# Altium PCB Power.PcbDoc
Units mm, origin at the board's own origin, x right, y up, seen from the top; angles counter-clockwise.
Board outline 109 x 111 mm, 2 copper layers (Top Layer, Bottom Layer); 18 components, 10 nets, 53 pads, 0 vias.
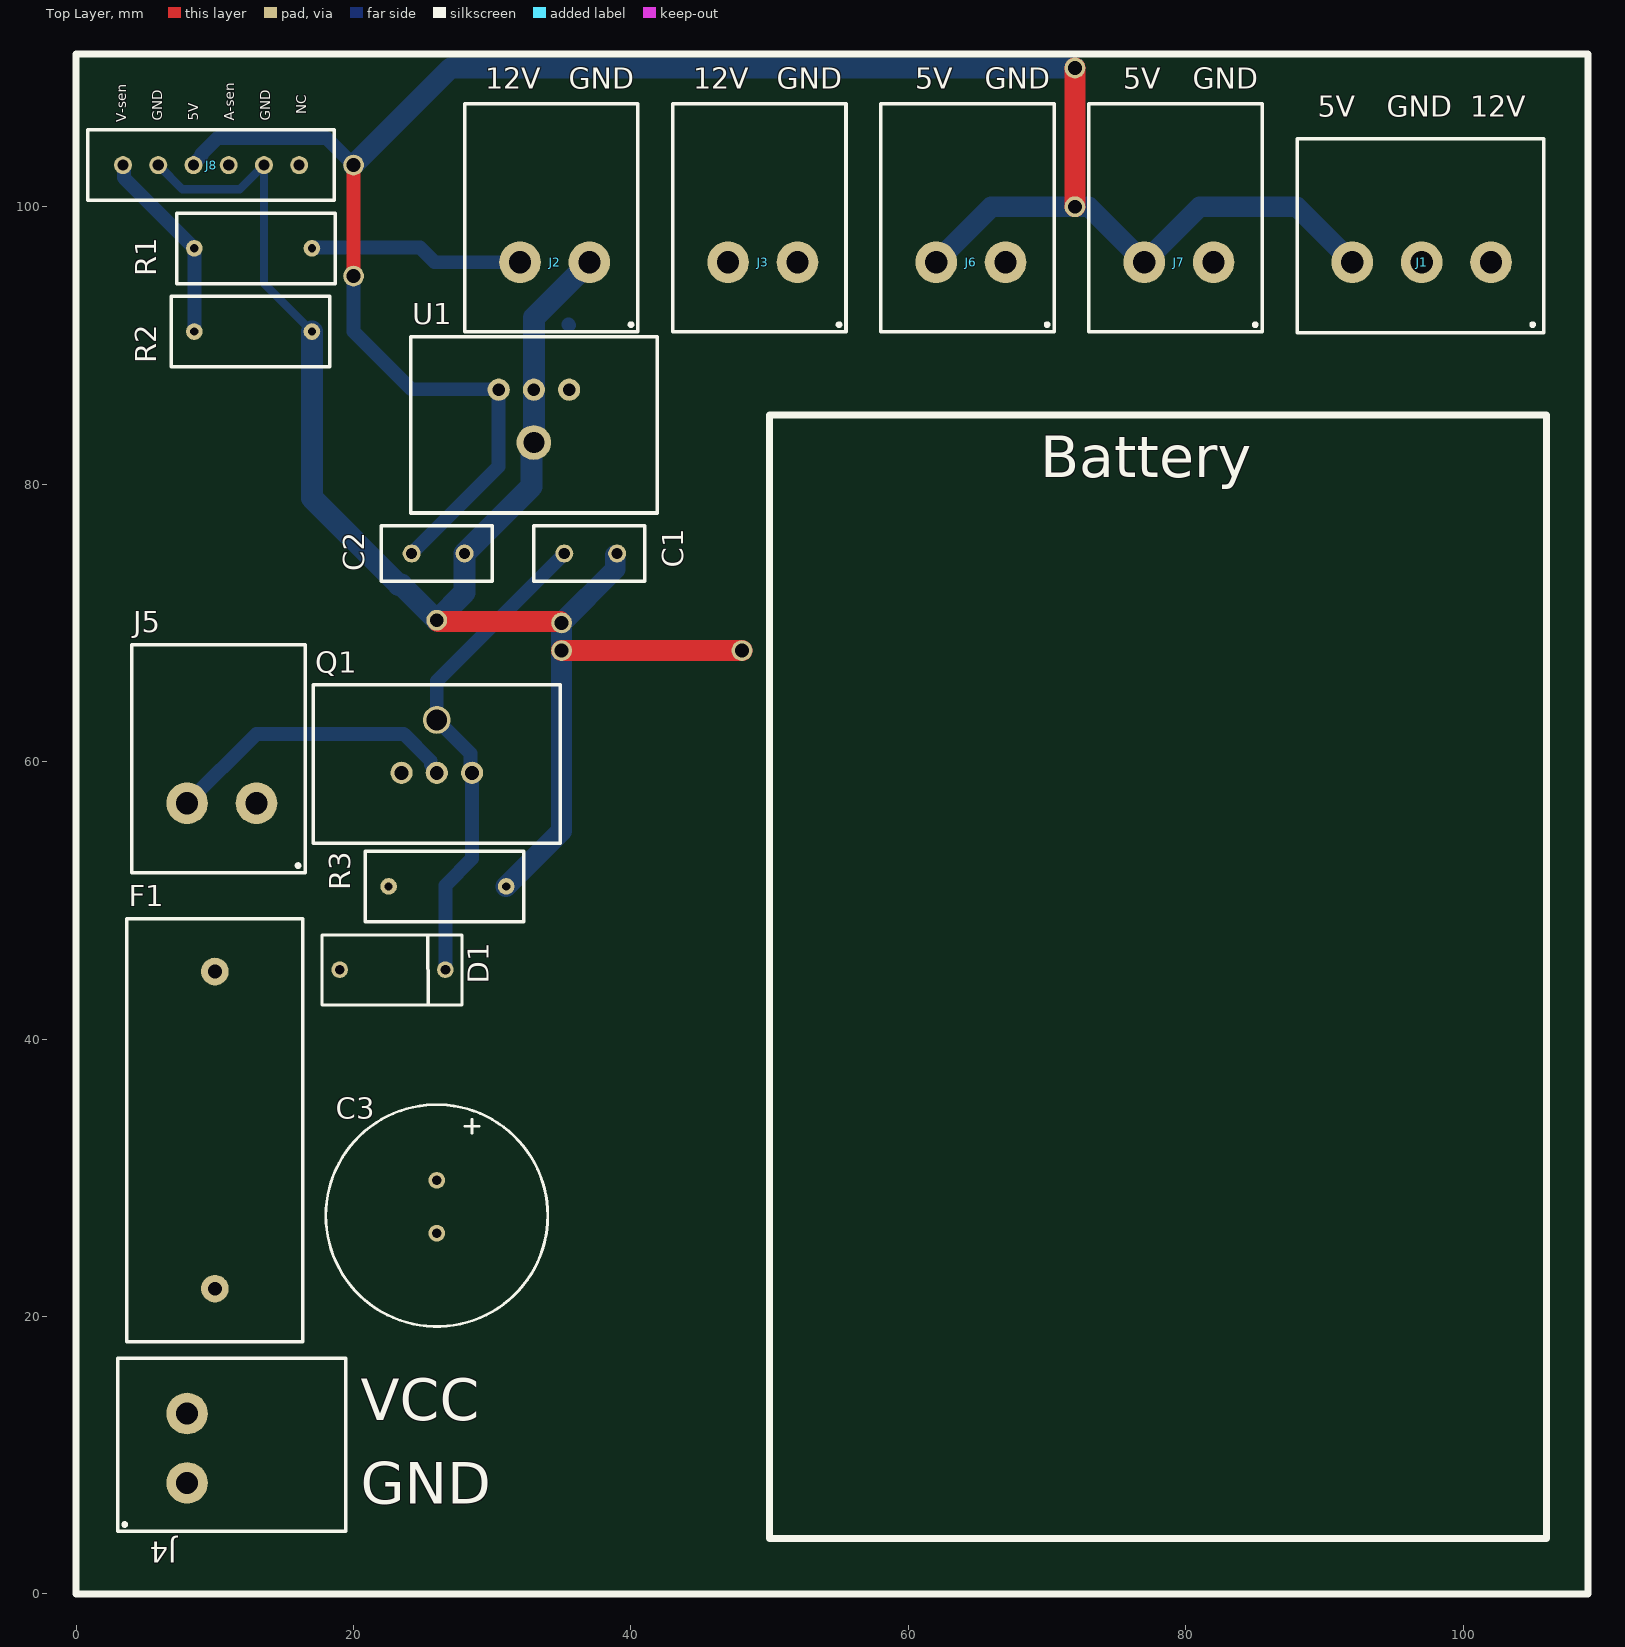
[diagram p0: Top Layer view]
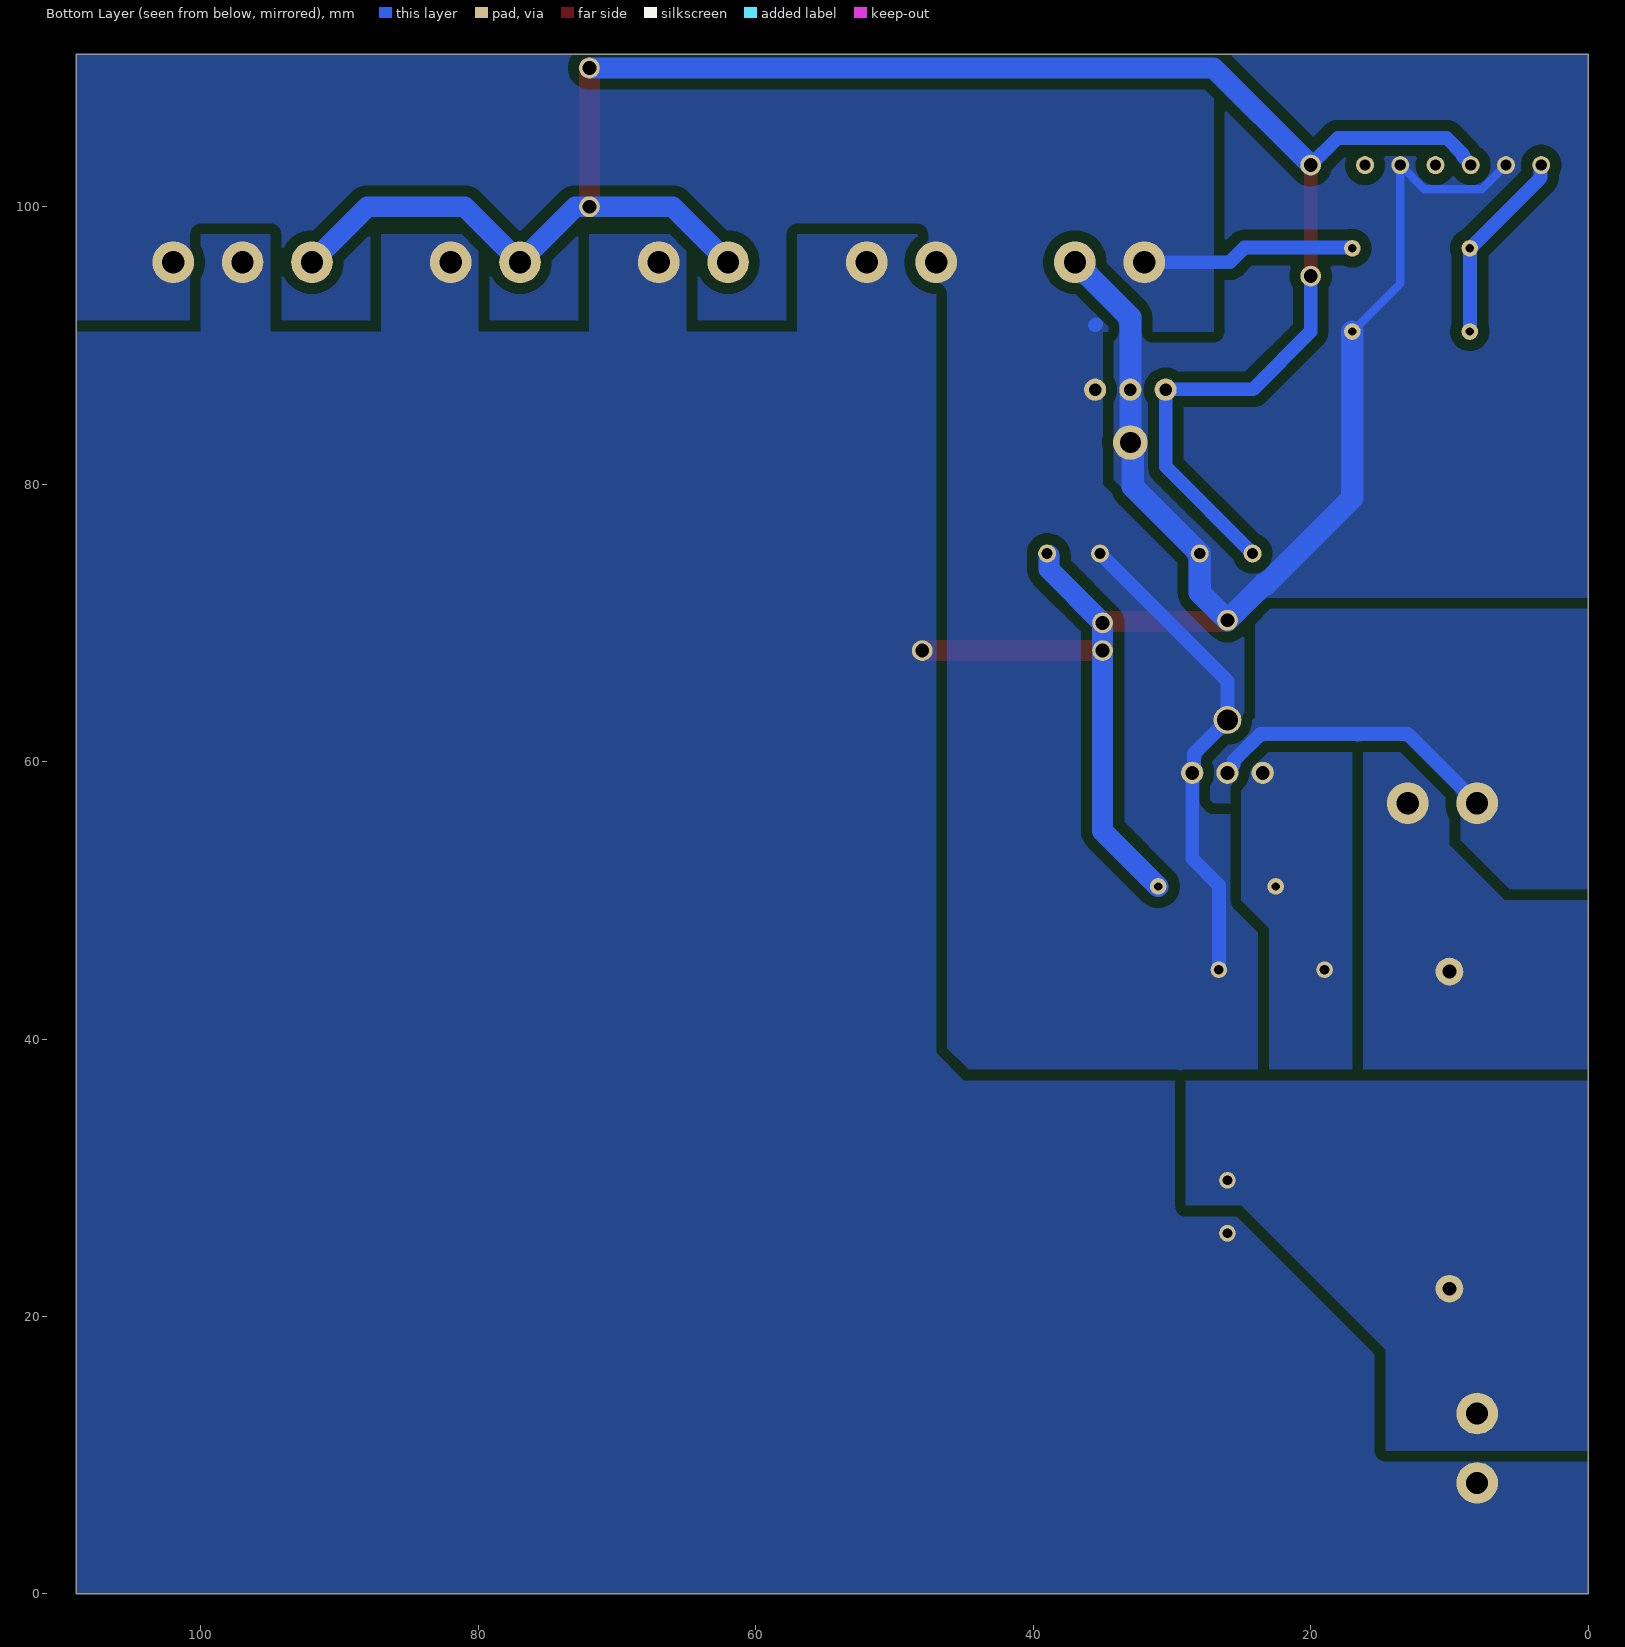
[diagram p1: Bottom Layer view, seen from below]

## Layer stack, top to bottom
Top Solder: solder mask 0.0102, Solder Resist, Dk 3.5
Top Layer: signal copper 0.0356
Dielectric 1: dielectric 0.32, FR-4, Dk 4.8
Bottom Layer: signal copper 0.0356
Bottom Solder: solder mask 0.0102, Solder Resist, Dk 3.5

## Board outline
109,111 0,111 0,0 109,0

## Design rules (kind name [scope] priority, off if disabled: settings)
Clearance [All] p1: gap=0.8 ignorepadtopadclearanceinfootprint=FALSE
PlaneClearance [All] p1: clearance=0.8
PlaneConnect [All] p1: planeconnectstyle=Relief reliefexpansion=0.8 reliefentries=4 reliefconductorwidth=0.8 reliefairgap=0.8
PolygonConnect [All] p1: connectstyle=Direct reliefconductorwidth=0.6 reliefentries=4 polygonreliefangle="90 Angle" airgapwidth=0.6
RoutingVias [All] p1: holewidth=0.711 width=1.27 viastyle="Through Hole" minholewidth=0.711 minwidth=1.27 maxholewidth=0.711 maxwidth=1.27
SolderMaskExpansion [All] p1: expansion=0.102 istentingtop=FALSE
Width [All] p1: maxlimit=2 minlimit=0.6 preferedwidth=0.8 minimp=50.000000 maximp=50.000000 favimp=50.000000
28 further rules are at their usual default settings.

## Classes and differential pairs
component class Power: C1 C2 C3 D1 F1 J2 J3 J4 J5 J6 J7 J8 Q1 R1 R2 R3 U1

## Components (designator, comment, footprint, x,y, rotation, side; value= is the part's Value field where it differs from the comment)
C1 "Ceramic Capacitor" "Ceramic Cap" 39,75 r180 top value=0.33uF
C2 "Ceramic Capacitor" "Ceramic Cap" 28,75 r180 top value=0.01uF
C3 "ALCapacitor" ALCap. 26,29.81 r270 top value=47uF
D1 "Zener" Zener10 19,45 r0 top
F1 "Fuse" "Fuse Base" 10,22 r90 top value=6A
J1 "Terminal Block 3" "Terminal Block 3" 102,96 r180 top
J2 "Terminal Block 2-pins" "Terminal Block 2 Plugable" 37,96 r180 top
J3 "Terminal Block 2-pins" "Terminal Block 2 Plugable" 52,96 r180 top
J4 "Terminal Block 2-pins" "Terminal Block 2 Plugable" 8,8 r90 top
J5 "Current Sensor" "Terminal Block 2 Plugable" 13,57 r180 top
J6 "Terminal Block 2-pins" "Terminal Block 2 Plugable" 67,96 r180 top
J7 "Terminal Block 2-pins" "Terminal Block 2 Plugable" 82,96 r180 top
J8 "Headers-6" "Headers 6-pins" 16.08,103 r180 top
Q1 "MOSFET" IRF9540 23.46,59.19 r0 top
R1 "Resistor" resistor 8.524,97 r0 top value=30K
R2 "Resistor" resistor 17,91 r180 top value=7.5K
R3 "Resistor" resistor 31,51 r180 top value=100K
U1 "LM7805" LM7805 35.54,86.81 r180 top

## Footprints (in the part's own frame and the unit in brackets; to place one, negate y for a bottom-side part, rotate by r counter-clockwise, add the part's x,y. Pads: shape width x height; smd on the part's side, far side on the other; paste and mask are expansions set on the pad)
ALCap. [mm]
  round 1.2 hole 0.7: 1(0,0) 2(3.81,0)
  silkscreen extent -5.46,-8 10.54,8, body extent -3.02,-5.05 6.98,4.95, height 20
"Ceramic Cap" [mm]
  round 1.3 hole 0.8: 1(0,0) 2(3.81,0)
  silkscreen extent -2,-2 6,2, body extent -0.83,-1.21 4.83,1.25, height 4
"Fuse Base" [mm]
  round 2 hole 1: 1(0,0) 2(22.86,0)
  silkscreen extent -3.81,-6.35 26.67,6.35, body extent -1.95,-4.8 25.23,4.8, height 13.07
"Headers 6-pins" [mm]
  round 1.3 hole 0.8: 1(0,0) 2(2.54,0) 3(5.08,0) 4(7.62,0) 5(10.16,0) 6(12.7,0)
  silkscreen extent -2.54,-2.54 15.24,2.54, body extent -1.27,-1.27 13.97,1.27, height 8.47
IRF9540 [mm]
  round 1.6 hole 1: D(2.54,0) G(0,0) S(5.08,0)
  round 2 hole 1.5: S(2.54,3.81)
  silkscreen extent -6.35,-5.08 11.43,6.35, body extent -4.96,-4.47 10.04,5.08, height 20.8
LM7805 [mm]
  round 1.6 hole 0.9: 1(0,0) 2(2.54,0) 3(5.08,0)
  round 2.5 hole 1.5: S(2.54,3.81)
  silkscreen extent -6.35,-3.81 11.43,8.89, body extent -4.81,-3.03 9.89,7.47, height 22.95
resistor [mm]
  round 1.2 hole 0.6: 1(0,0) 2(8.476,0)
  silkscreen extent -1.27,-2.54 10.16,2.54, body extent -0.33,-1.25 8.77,1.25, height 3.25
"Terminal Block 2 Plugable" [mm]
  round 3 hole 1.6: 1(0,0) 2(5,0)
  silkscreen extent -3.5,-11.43 9,5, body extent -2.46,-10.16 7.54,1.84, height 9.2
"Terminal Block 3" [mm]
  round 3 hole 1.6: 1(0,0) 2(5,0) 3(10,0)
  silkscreen extent -3.81,-8.89 13.97,5.08, body extent -2.54,-8.29 12.7,3.81, height 8.67
Zener10 [mm]
  round 1.2 hole 0.7: 1(0,0) 2(7.62,0)
  silkscreen extent -1.27,-2.54 8.83,2.5, body extent -0.26,-1 7.86,1, height 2

## Part data
J5: library part "Terminal Block 2-pins", MF="Phoenix Contact", PN=1935161, Supplier=Digikey, Supplier PN=277-1667-ND
Q1: "P-Channel", ComponentLink1Description=link, ComponentLink1URL=https://makerselectronics.com/product/irf9540, PN=IRF9540N, Supplier=Makers, Supplier PN=14721190833f
D1: Vd=10V
J2 J3 J4 J6 J7: MF="Phoenix Contact", PN=1935161, Supplier=Digikey, Supplier PN=277-1667-ND
U1: ComponentLink1Description=link, ComponentLink1URL=https://makerselectronics.com/product/regelator-7805, PN=LM7805, Supplier=Makers

## Free pads (board coordinates)
  round 1.5 hole 1: S3(26,70.19) S4(35,70) S7(20,103) S8(20,95) S11(35,68) S12(48,68) S13(72,100) S14(72,110)

## Nets (pads, with @x,y where several pads share a name; then routed paths per layer and width w, separated by ;. In a path a pad name is that pad's centre, name@x,y a point inside that pad or via, vN(x,y) a via of type N, cw(c..) or ccw(c..) an arc to the next point about the centre after c; other vN are vias at no path point)
+5V0: C2.2 J1.3 J6.2 J7.2 J8.4 pad.S7 pad.S8 pad.S13 pad.S14 U1.3 | length 153.4
  Top Layer w1: pad.S8 pad.S7
  Top Layer w1.5: pad.S13 pad.S14
  Bottom Layer w1: J8.4 8.46,103.081 9.05,103.671 9.05,103.808 10.192,104.95 18.05,104.95 pad.S7 ; pad.S8 20,91 24.16,86.84 30.43,86.84 U1.3 30.45,86.8 30.45,81.26 C2.2
  Bottom Layer w1.5: pad.S7 27,110 pad.S14 ; J6.2 66,100 pad.S13 73,100 J7.2 81,100 88,100 J1.3
+12V0: C1.2 D1.2 J1.1 J2.2 J3.2 Q1.S R1.2 U1.1 | length 51.2
  Bottom Layer w1: R1.2 17.054,97 17.104,97.05 24.78,97.05 25.83,96 J2.2 ; D1.2 26.62,51.081 28.54,53.001 28.54,59.19 28.425,59.305 28.425,60.575 26,63 26,65.81 C1.2 ; 35.485,91.515 35.54,91.46
GND: C1.1 C2.1 C3.2 J1.2 J2.1 J3.1 J4.1 J6.1 J7.1 J8.2 J8.5 pad.S3 pad.S4 pad.S11 pad.S12 R2.1 R3.1 U1.2 U1.S | length 126.8
  Top Layer w0.6: pad.S4@34.905,70.095 pad.S4
  Top Layer w1.5: pad.S3@26.095,70.095 pad.S4@34.905,70.095 ; pad.S11 pad.S12
  Bottom Layer w0.6: J8.5 7.67,101.25 11.79,101.25 J8.2 13.54,94.46 R2.1 ; C1.1@38.866,74.866 C1.1
  Bottom Layer w1.5: R3.1 35,55 pad.S11 pad.S4 38.866,73.866 C1.1@38.866,74.866
  Bottom Layer w1.6: R2.1 17,79.008 23.258,72.75 23.44,72.75 pad.S3 28,72.19 C2.1 32.828,79.828 32.828,82.828 U1.S U1.2 33,92 J2.1
NC: J8.1
NetD1_1: D1.1 Q1.G R3.2
NetF1_2: F1.2 J5.1
NetJ5_2: J5.2 Q1.D | length 21.5
  Bottom Layer w1: J5.2 13,62 23.62,62 25.56,60.06 25.56,59.792 26,59.352 Q1.D
Sensed_A: J8.3
Sensed_V: J8.6 R1.1 R2.2 | length 14.1
  Bottom Layer w1: J8.6 3.437,102.943 3.437,102.087 R1.1 R2.2
VCC: C3.1 F1.1 J4.2

## Polygon pours and split planes (outlines as drawn)
+12V0 on Bottom Layer "NONET_L01_P-001" (solid, pour order 16): 109,111 27,111 27,91 106,91 27,91 109,91
GND on Bottom Layer "NONET_L01_P-001" (solid, pour order 17): 0,111 0,71 0.012,70.988 33.796,70.988 33.796,72.796 41,80 41,111
+12V0 on Bottom Layer "NONET_L01_P-001" (solid, pour order 14): 23,37 23,48 25,50 25,57 27,57 27,60 24,63 24,71 26,71 35,80 35,91 42,91 42,98 47,98 47,39 45,37
NetJ5_2 on Bottom Layer "NONET_L01_P-001" (solid, pour order 8): 0,50 6,50 10.264,54.264 10.264,57.409 10.409,57.409 14,61 14.311,60.689 23.311,60.689 25,59 25,57 27,57 27.347,57.347 27.347,60.9 26.291,60.9 24,63.191 24,71 0,71
GND on Bottom Layer "NONET_L01_P-001" (solid, pour order 12): 0.046,10.327 14.596,10.327 14.596,17.596 25,28 29,28 29,37 45,37 47,39 47,98 57,98 57,91 65,91 65,98 72,98 72,91 80,91 80,98 87,98 87,91 95,91 95,98 100,98 100,91 109,91 109,0 0,0
NetF1_2 on Bottom Layer "NONET_L01_P-001" (solid, pour order 6): 0,37 17,37 17,62 11,62 10,61 10,54 6,50 0,50
NetD1_1 on Bottom Layer "NETD1_1_L02_P004" (solid, pour order 4): 23,37 23,48 25,50 25,62 17,62 17,37
VCC on Bottom Layer "NONET_L01_P-001" (solid, pour order 2): 0,10.373 0.046,10.327 14.596,10.327 14.596,17.596 25,28 29,28 29,37 0,37

## Silkscreen, mask and mechanical layers (free items; w line width, h text height)
Top Overlay:
  lines w0.5: 104,85 106,85 106,4 50,4 50,85 105,85 ; 0,0 109,0 109,111 0,111 0,0
  text "12V" at 29.5,108.5 h1.5
  text "GND" at 35.5,108.5 h1.5
  text "12V" at 44.5,108.5 h1.5
  text "GND" at 50.5,108.5 h1.5
  text "5V" at 60.5,108.5 h1.5
  text "GND" at 65.5,108.5 h1.5
  text "5V" at 75.5,108.5 h1.5
  text "GND" at 80.5,108.5 h1.5
  text "NC" at 16.578,106.682 h0.7 r90
  text "5V" at 89.5,106.5 h1.5
  text "GND" at 94.5,106.5 h1.5
  text "12V" at 100.5,106.5 h1.5
  text "GND" at 6.199,106.2 h0.7 r90
  text "5V" at 8.794,106.2 h0.7 r90
  text "A-sen" at 11.388,106.2 h0.7 r90
  text "GND" at 13.983,106.2 h0.7 r90
  text "V-sen" at 3.605,106.079 h0.7 r90
  text "Battery" at 69.5,80.5 h3
  text "VCC" at 20.5,12.5 h3
  text "GND" at 20.5,6.5 h3